# Altium PCB SiPM_ASSY2.PCBDOC
Units mil, origin at the board's own origin, x right, y up, seen from the top; angles counter-clockwise.
Board outline 679.32 x 777.75 mil, 4 copper layers (TOP, G1, PWR, BOT), stack 58.685 mil thick; 6 components, 5 nets, 25 pads, 10 vias.
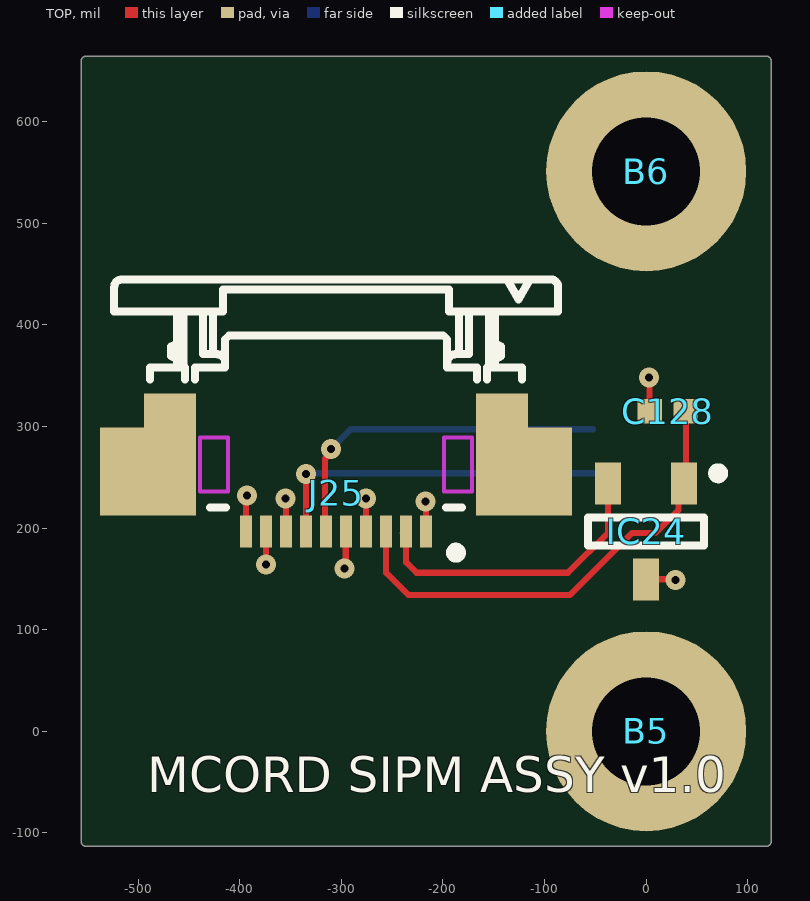
[diagram p0: TOP view]
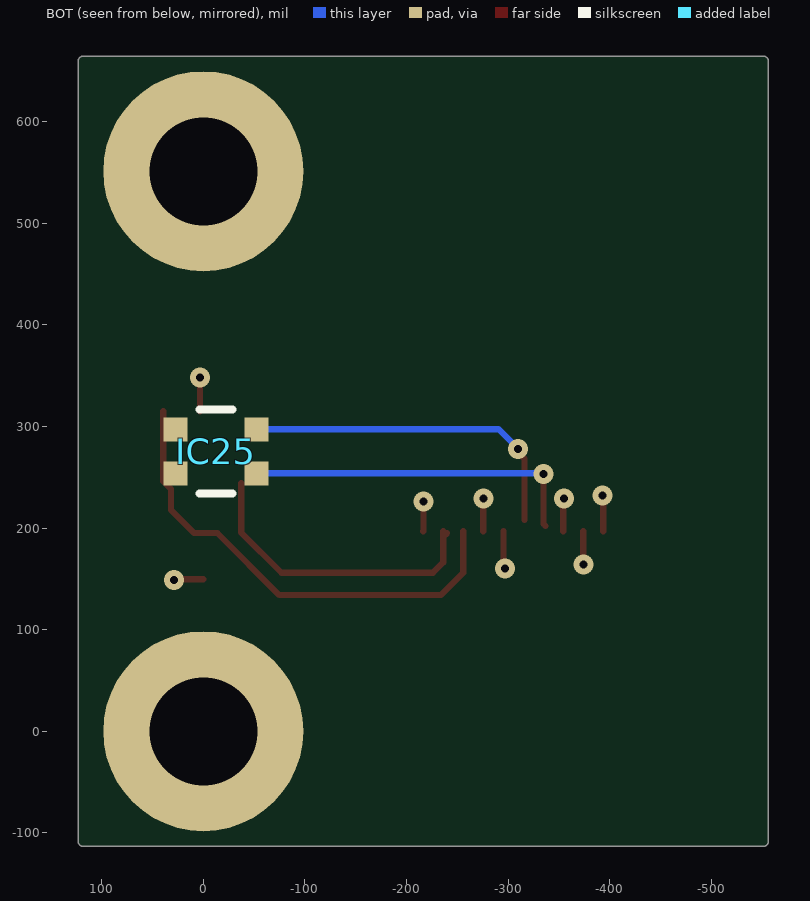
[diagram p1: BOT view, seen from below]
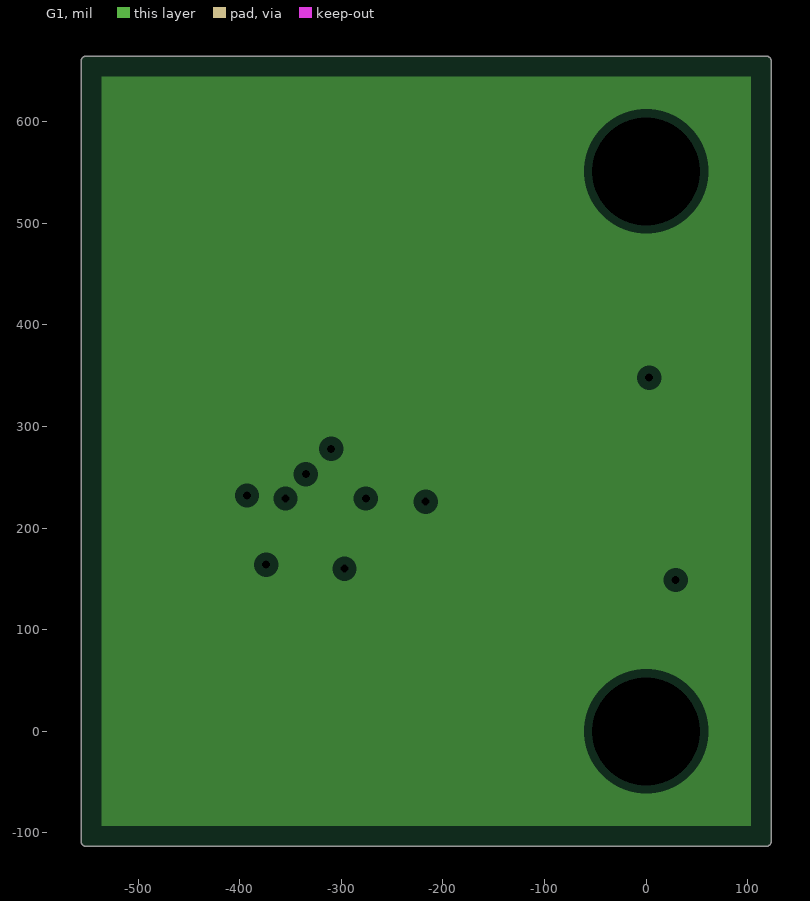
[diagram p2: G1, clearances drawn from the general rule]
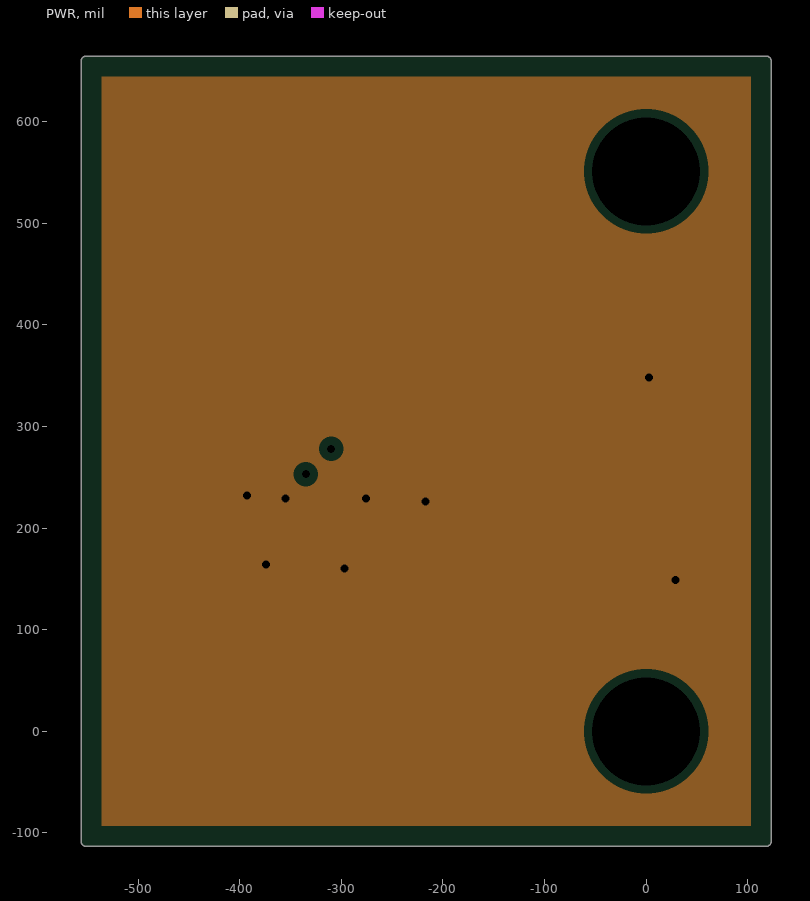
[diagram p3: PWR, clearances drawn from the general rule]
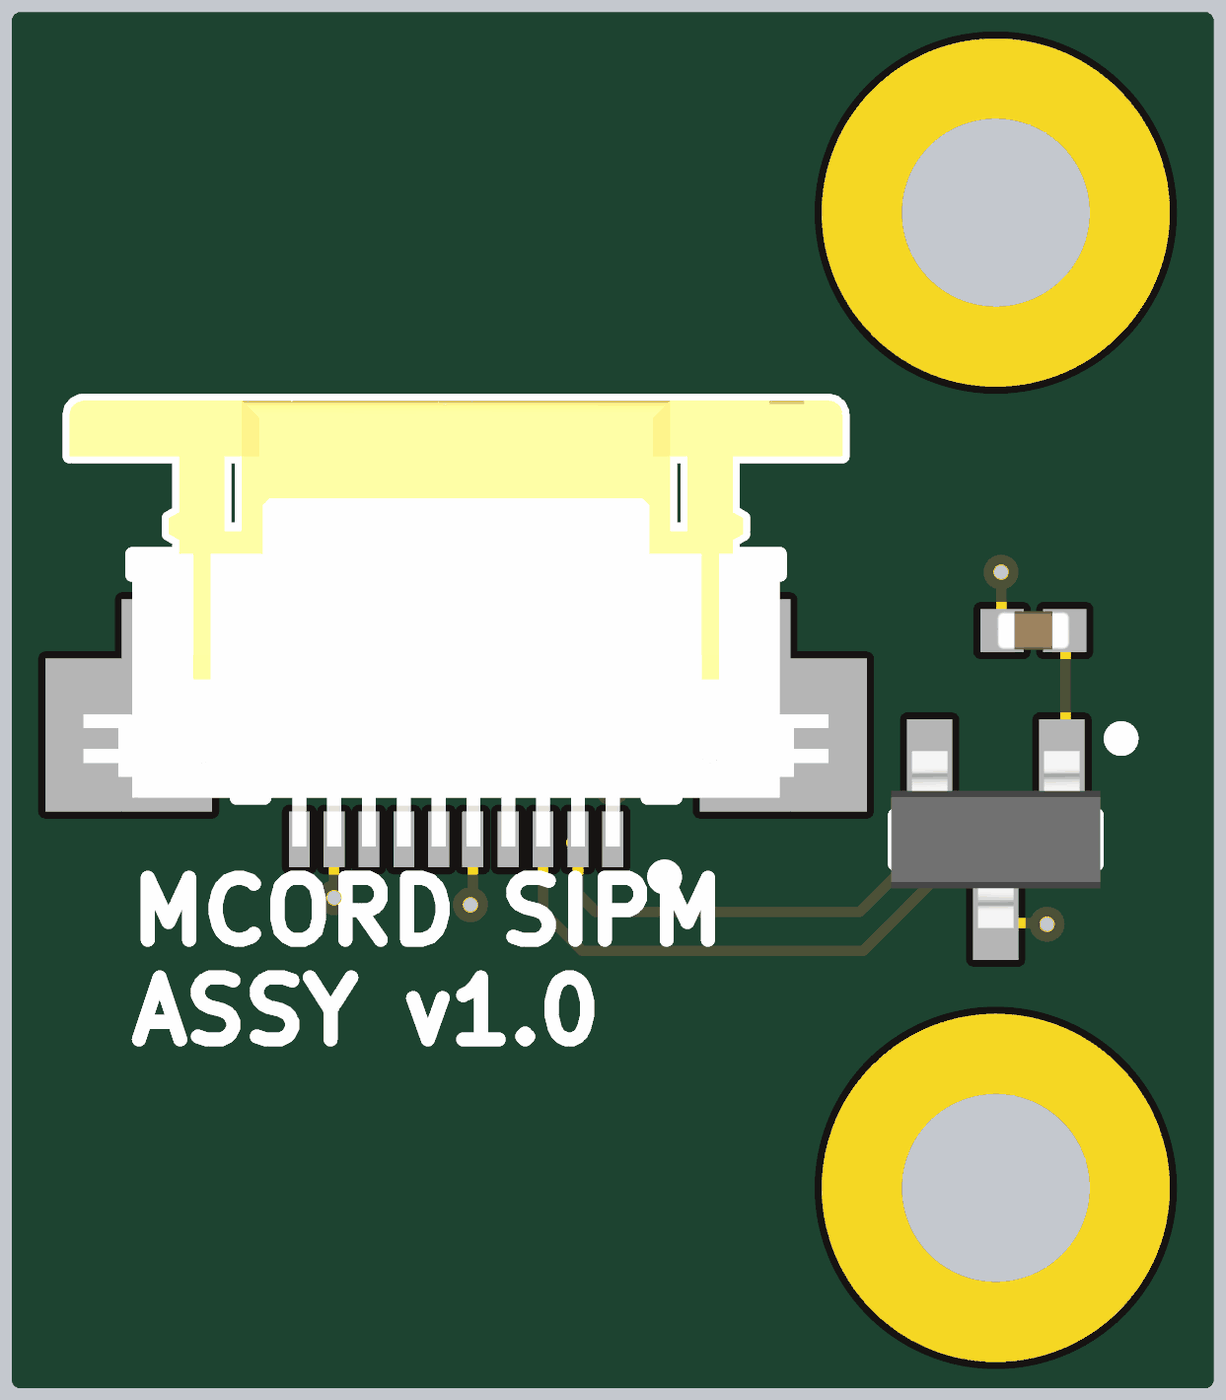
[diagram p4: 3D render of the assembled board from above, using the file's embedded part models]

## Layer stack, top to bottom
TopSolder: solder mask 0.3937, Solder Resist, Dk 3.5
TOP: signal copper 1.3778
Dielectric1: prepreg 7.0866, FR-4, Dk 4.8
G1: plane copper 1.3779
Dielectric2: core 39, Core-042, Dk 4.6
PWR: plane copper 1.3779, net GND
Dielectric3: prepreg 7.0866, FR-4, Dk 4.8
BOT: signal copper 1.3778
BottomSolder: solder mask 0.3937, Solder Resist, Dk 3.5

## Board outline
-551.18,-113.28 cw(c-551.18,-108.27) -556.2,-108.27 -556.2,659.45 cw(c-551.18,659.45) -551.18,664.46 118.11,664.46 cw(c118.11,659.45) 123.13,659.45 123.13,-108.27 cw(c118.11,-108.27) 118.11,-113.28

## Design rules (kind name [scope] priority, off if disabled: settings)
AcuteAngle [All] p1: minimum=6.00000000000000E+0001 checktracksonly=FALSE
Clearance keepout [All vs OnLayer('KeepOutLayer')] p1: gap=3.94 ignorepadtopadclearanceinfootprint=FALSE
Clearance [All] p2: gap=6 ignorepadtopadclearanceinfootprint=FALSE except(10: Arc-Poly Track-Poly SMDPad-Poly THPad-Poly Via-Poly Fill-Poly Poly-Poly)
DiffPairsRouting [All] p1: maxlimit=20 minlimit=15 mostfreqgap=17 toplayer_minwidth=15 toplayer_maxwidth=15 toplayer_prefwidth=15 bottomlayer_minwidth=15 bottomlayer_maxwidth=15 bottomlayer_prefwidth=15 maxuncoupledlength=500
HoleSize [All] p1: absolutevalues=TRUE maxlimit=200 minlimit=1 maxpercent=80.000 minpercent=20.000
MinimumSolderMaskSliver [All] p1: minsoldermaskwidth=0
MinimumSolderMaskSliver SilkscreenOverComponentPads [All] p2: minsoldermaskwidth=0
PlaneClearance [All] p1: clearance=8
PlaneConnect PlaneConnect_pad [(InPadClass('All Pads'))] p1: planeconnectstyle=Relief reliefexpansion=20 reliefentries=4 reliefconductorwidth=10 reliefairgap=10
PlaneConnect [All] p2: planeconnectstyle=Direct reliefexpansion=20 reliefentries=4 reliefconductorwidth=10 reliefairgap=10
PolygonConnect PolygonConnect_pad [(InPadClass('All Pads'))] p1: connectstyle=Relief reliefconductorwidth=10 reliefentries=4 polygonreliefangle="90 Angle" airgapwidth=10
PolygonConnect [All] p2: connectstyle=Direct reliefconductorwidth=10 reliefentries=4 polygonreliefangle="90 Angle" airgapwidth=10
RoomDefinition SiPM_ASSY2 [InComponentClass('SiPM_ASSY2')] p1: confinementstyle=ConfineIn formatcopy=TRUE lockcomponents=FALSE outline -354.33,118.11 -393.7,118.11 -393.7,-78.74 -354.33,-78.74
RoutingVias [All] p1: holewidth=7.87 width=19.68 viastyle="Through Hole" minholewidth=7.87 minwidth=19.68 maxholewidth=19.68 maxwidth=39.37
SilkToSilkClearance [All] p1: silktosilkclearance=0
SilkToSolderMaskClearance [IsPad] p1: minsilkscreentomaskgap=0 clearancetoexposedcopper=TRUE
SolderMaskExpansion [All] p1: expansion=4
ViasUnderSMD ViasUnderSMD_allow [InComponent('IC18') or InComponent('IC10') or InComponent('IC13') or InComponent('IC14') or InComponent('IC15')] p1: allowed=TRUE
ViasUnderSMD [All] p2: allowed=FALSE
Width Width_1 [(InDifferentialPairClass('All Differential Pairs'))] p1: maxlimit=8 minlimit=8 preferedwidth=8
Width [All] p2: maxlimit=100 minlimit=6 preferedwidth=6
23 further rules are at their usual default settings.

## Components (designator, comment, footprint, x,y, rotation, side; value= is the part's Value field where it differs from the comment)
B5 "Plated Hole" MTG270_500 0,0 r0 top
B6 "Plated Hole" MTG270_500 0,551.18 r0 top
C128 "100nF" CAPC1005X55N 21.26,314.96 r0 top
IC24 "LM45CIM3" SOT95P251X112-3N 0,196.85 r270 top
IC25 "S13360-1325PE" HAMAMATSU_S13360-1325PE -12.33,275.59 r90 bottom
J25 "FFC/FPC" MOLEX_52745-1097 -305.12,196.85 r180 top

## Footprints (in the part's own frame and the unit in brackets; to place one, negate y for a bottom-side part, rotate by r counter-clockwise, add the part's x,y. Pads: shape width x height; smd on the part's side, far side on the other; paste and mask are expansions set on the pad)
CAPC1005X55N [mm] "Capacitor, Non-Polarized, Chip; 1.00mm L X 0.50mm W X 0.70mm H, IPC Medium Density"
  rect 0.62x0.62 smd: 1(-0.45,0) 2(0.45,0)
  body extent -0.52,-0.27 0.53,0.28, height 0.55
HAMAMATSU_S13360-1325PE [mm] "1.3 x 1.3mm2, 50µm Microcell Type, SMD MPPC (Multi-Pixel Photon Counter, Body 2.1mm x mm X 2.625mm"
  rect 0.6x0.6 smd: 1(-0.55,1.012) 2(-0.55,-1.012) 3(0.55,-1.012) 4(0.55,1.012)
  silkscreen extent -1.05,-0.41 1.05,0.41, body extent -1.05,-1.31 1.05,1.31, height 1
MOLEX_52745-1097 [mm] "10 Contacts, 0.5mm Pitch, Right Angled Surface Mount FPC Connector, ZIF, Top Contact Style"
  rect 0.3x0.8 smd: 1(-2.25,0) 2(-1.75,0) 3(-1.25,0) 4(-0.75,0) 5(-0.24,0) 6(0.25,0) 7(0.75,0) 8(1.25,0) 9(1.75,0) 10(2.25,0)
  rect 1.1x2.2 smd: MECH(-5.35,-1.5) MECH(5.35,-1.5)
  rect 1.3x3.05 smd: MECH(-4.15,-1.925) MECH(4.15,-1.925)
  TOP keep-out lines w0.1: 3.4,-1 2.7,-1 2.7,-2.34 3.4,-2.34 3.4,-1 ; -2.7,-1 -2.7,-2.34 -3.4,-2.34 -3.4,-1 -2.7,-1
  silkscreen extent -5.55,-6.3 5.55,0.66, body extent -5.55,-6.3 5.55,0.1, height 2
MTG270_500 [mm] "Plated Through Hole: Hole Dia.=2.7mm Pad Dia.=5.0mm"
  round 5 hole 2.7: 1(0,0)
SOT95P251X112-3N [mm] "SOT23 3-Leads, Pitch 0.95mm - Body 1.3x2.9mm, IPC Medium Density"
  rect 1.05x0.65 smd: 1(-1.2,0.95) 2(-1.2,-0.95) 3(1.2,0)
  silkscreen extent -1.57,-1.45 0.35,1.92, body extent -1.27,-1.5 1.27,1.5, height 1.12

## Part data
B5 B6: library part PLATED_HOLE2.7_PAD5.0, "Single Terminal Socket", Author="CERN DEM JMW", ComponentHeight=0mm, Component Type="Standard (No BOM)", CreateDate=27.09.2011, Family="Plated Hole", HelpURL=Undefined, LatestRevisionDate=27.09.2011, Mounted=No, PackageDescription="Plated Through Hole: Hole Dia.=2.7mm Pad Dia.=5.0mm", Part Description="Plated Through Hole: Hole Dia.=2.7mm Pad Dia.=5.0mm", Part Number=PLATED_HOLE2.7_PAD5.0, Pin Count=1, Sense=No, SMD=No, Socket=No, Status=None
C128: library part CC0402_100NF_16V_10%_X7R, "Non-polarised capacitor", Case=0402, Manufacturer=GENERIC, Manufacturer1 ComponentHeight=0.55mm, Manufacturer1 Example=MURATA, Manufacturer1 Part Number=GRM155R71C104KA88D, Tolerance=±10%, Voltage=16V, Author="CERN DEM JLC", Component Type=Standard, CreateDate=05.12.2013, HelpURL=\\cern.ch\dfs\Applications\Altium\Datasheets\CC0402_X7R_MURATA_GRM.pdf, LatestRevisionDate=03.12.2007, Manufacturer Part Number=CC0402_100NF_16V_10%_X7R, Mounted=Yes, Part Description="SMD Multilayer Chip Ceramic Capacitor", Part Number=CC0402_100NF_16V_10%_X7R, Pin Count=2, Sense=No, SMD=Yes, Socket=No, Status="Not Recommended", TC=X7R
IC24: "-20° to +100°C ±3°C Precision Centigrade Temperature Sensors", Case=SOT23, Manufacturer="NATIONAL SEMICONDUCTOR", Author="CERN DEM JLC", Bonding=No, ComponentHeight=1.12mm, Component Type=Standard, CreateDate=02.12.2009, Device=LM45CIM3, HelpURL=\\cern.ch\dfs\Applications\Altium\Datasheets\LM45CIM3.pdf, LatestRevisionDate=02.12.2009, Manufacturer Part Number=LM45CIM3, Mounted=Yes, PackageDescription="SOT23 3-Leads, Pitch 0.95mm - Body 1.3x2.9mm, IPC Medium Density", Part Description="-20° to +100°C ±3°C Precision Centigrade Temperature Sensors", Part Number=LM45CIM3, Pin Count=3, PressFit=No, Sense=No, SMD=Yes, Socket=No, Status=Obsolete
IC25: "MPPC (Multi-Pixel Photon Counter)", Manufacturer=HAMAMATSU, Author=GK, Bonding=No, ComponentHeight=1mm, Component Type=Standard, CreateDate=01.04.2015, Device=S13360-1325PE, HelpURL=\\cern.ch\dfs\Applications\Altium\Datasheets\S13081-050PE.pdf, LatestRevisionDate=01.04.2015, Manufacturer Part Number=S13360-1325PE, Mounted=Yes, PackageDescription="1.3 x 1.3mm2, 25µm Pixel Pitch, SMD MPPC (Multi-Pixel Photon Counter, Body 2.1mm x mm x 2.625mm x 1mm", Part Description="1.3 x 1.3mm2, 25µm Pixel Pitch, SMD MPPC (Multi-Pixel Photon Counter)", Part Number=S13360-1325PE, Pin Count=4, PressFit=No, Sense=No, SMD=Yes, Socket=No
J25: library part MOLEX_52745-1097, "Connector 10 Female", Manufacturer=MOLEX, Manufacturer Part Number=52745-1097, Author="CERN DEM JLC", ComponentHeight=2mm, Component Type=Standard, CreateDate=04.11.2014, Family=FFC/FPC, HelpURL=\\cern.ch\dfs\Applications\Altium\Datasheets\MOLEX_52745-1097.pdf, LatestRevisionDate=05.12.2014, Mounted=Yes, Part Description="10 Contacts, 0.5mm Pitch, Right Angled Surface Mount FFC/FPC Connector, ZIF, Top Contact Style", Part Number=MOLEX_52745-1097, Pin Count=10, PressFit=No, Sense=No, SMD=Yes, Socket=No, Status=None

## Via types
v1: diameter 19.68, hole 7.87, TOP to BOT, tented both sides, 10 vias

## Nets (pads, with @x,y where several pads share a name; then routed paths per layer and width w, separated by ;. In a path a pad name is that pad's centre, name@x,y a point inside that pad or via, vN(x,y) a via of type N, cw(c..) or ccw(c..) an arc to the next point about the centre after c; other vN are vias at no path point)
GND: C128.1 IC24.3 J25.1 J25.4 J25.5 J25.8 J25.9 J25.10 | length 262.1
  TOP w6: J25.10 -393.7,231.3 v1(-393,232) ; v1@-374.02,164.02 J25.9 ; v1(-355,229) -354.33,228.33 J25.8 ; v1(-297,160) -295.67,161.33 J25.5 ; v1(-276,229) -275.59,228.59 J25.4 ; v1(-217,226) -216.77,225.77 -216.77,197.08 J25.1 ; IC24.3 28.39,149.61 v1(29,149) ; v1(3,348) 3.15,347.85 C128.1@3.15,314.96
  other v1: -374,164
NetC128_2: C128.2 IC24.1 J25.3 | length 472.7
  TOP w6: J25.3 -255.91,156 -233.91,134 -75,134 -14,195 9,195 31.94,217.94 31.94,238.63 IC24.1 39.37,246.06 C128.2@39.37,314.96
NetIC24_2: IC24.2 J25.2 | length 303.9
  TOP w6: J25.2@-240,195 J25.2@-236.22,191.22 ; J25.2 J25.2@-236.22,191.22 ; IC24.2 -37.4,195.6 -77,156 -226,156 -236.22,166.22 J25.2@-236.22,191.22
SIPM_A: IC25.3 J25.6 | length 338.3
  TOP w6: J25.6@-316,208 -316,268.3 -310,274.3 v1(-310,278)
  BOT w6: v1(-310,278) -290.76,297.24 IC25.3
SIPM_C: IC25.2 J25.7 | length 335
  TOP w6: J25.7@-337,202 -335,204 v1(-335,253)
  BOT w6: v1(-335,253) -334.06,253.94 IC25.2
pads on no net: B5.1 B6.1 IC25.1 IC25.4 J25.MECH

## Polygon pours and split planes (outlines as drawn)
no net on G1 (split plane): 103.03,-93.19 -536.1,-93.19 -536.1,644.37 103.03,644.37
GND on PWR (split plane): 103.03,-93.19 -536.1,-93.19 -536.1,644.37 103.03,644.37

## Silkscreen, mask and mechanical layers (free items; w line width, h text height)
TopOverlay:
  text "MCORD SIPM ASSY v1.0" at -491,-60 h35
Mechanical1:
  lines w10: -91.73,659.45 118.11,659.45 118.11,-108.27 -551.18,-108.27 -551.18,659.45 -88.58,659.45
Mechanical14:
  lines w0.39: -27.59,301.18 -27.59,301.18
  lines w3.94: -27.59,250 23.59,301.18 ; -1.57,0 -1.57,559.45 ; 23.59,250 -27.59,301.18 ; -27.59,301.18 -27.59,301.18 ; 23.59,301.18 23.59,301.18